# EAGLE board SignalMast-ColorLight-DualHead_array (EAGLE 7.7.0)
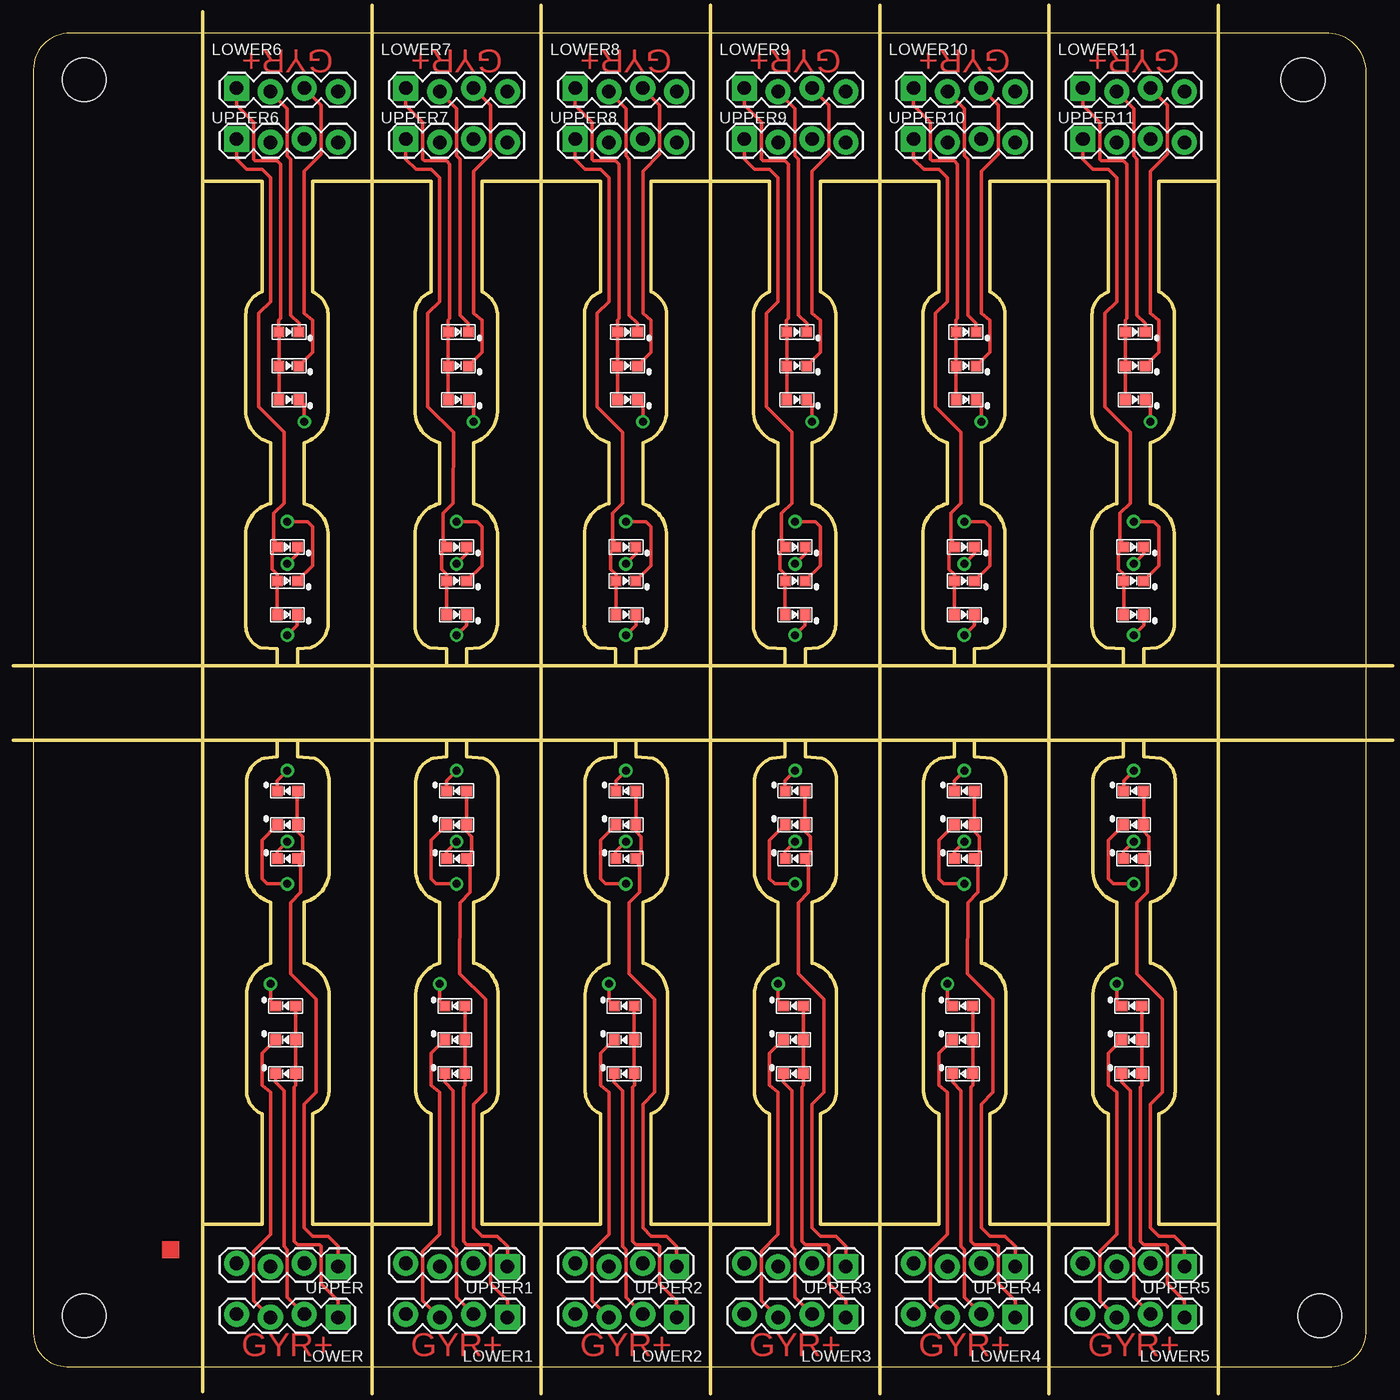
[diagram p0: board, top side]
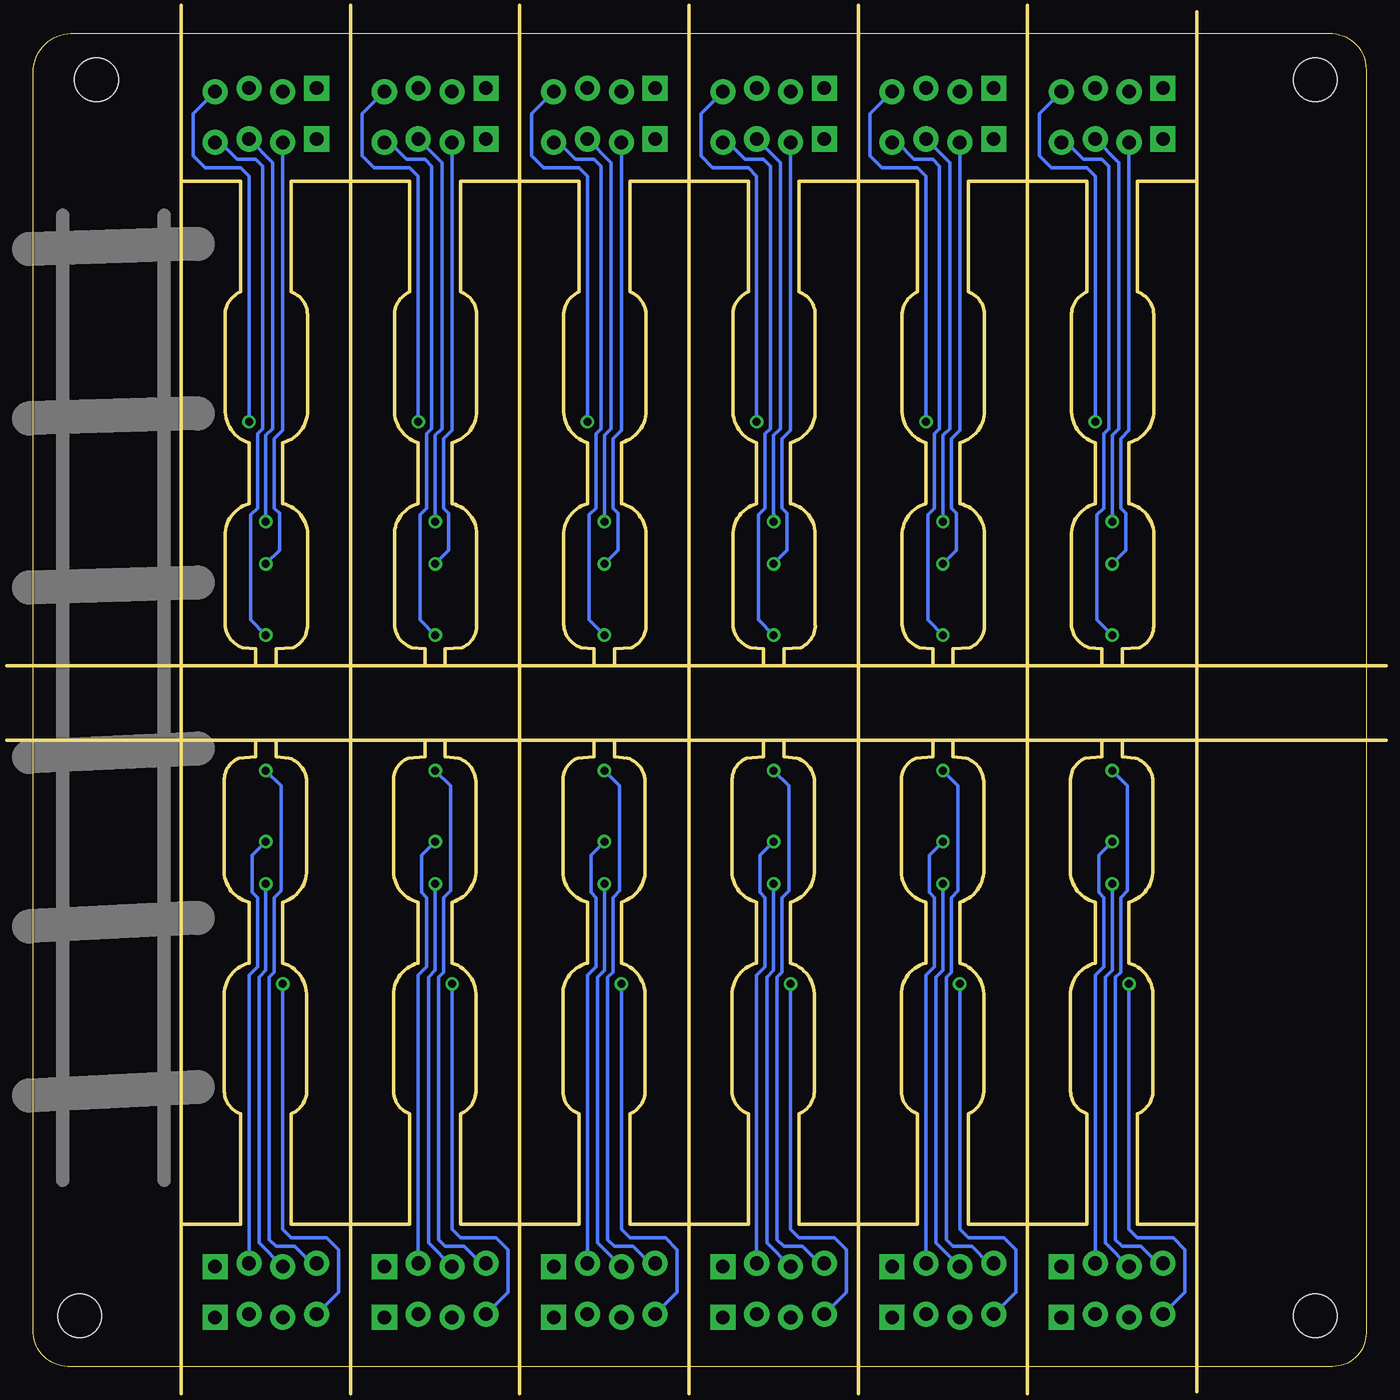
[diagram p1: board, bottom side, seen from below]

Size 100.01 x 100 mm. Coordinates in mm from the lower left corner, seen from the top.
Outline: 12.84,10.67 17.15,10.67 17.15,18.97 arc-70 16,20.78 16,27.97 arc-70 17.79,30.27 17.79,34.84 arc-70 16,37.04 16,43.89 arc-70 17.31,45.64 18.3,45.72 18.3,46.99 12.71,46.99
Outline: 25.41,10.67 20.96,10.67 20.96,18.97 arc70 22.18,20.65 22.18,28.1 arc70 20.33,30.27 20.33,34.84 arc70 22.18,36.91 22.18,43.89 arc70 21.09,45.64 19.82,45.72 19.82,46.99 31,46.99 31,45.72 30.01,45.64 arc70 28.7,43.89 28.7,37.04 arc70 30.49,34.84 30.49,30.27 arc70 28.7,27.97 28.7,20.78 arc70 29.85,18.97 29.85,10.67 25.54,10.67
Outline: 38.11,10.67 33.66,10.67 33.66,18.97 arc70 34.88,20.65 34.88,28.1 arc70 33.03,30.27 33.03,34.84 arc70 34.88,36.91 34.88,43.89 arc70 33.79,45.64 32.52,45.72 32.52,46.99 43.7,46.99 43.7,45.72 42.71,45.64 arc70 41.4,43.89 41.4,37.04 arc70 43.19,34.84 43.19,30.27 arc70 41.4,27.97 41.4,20.78 arc70 42.55,18.97 42.55,10.67 38.24,10.67
Outline: 50.81,10.67 46.36,10.67 46.36,18.97 arc70 47.58,20.65 47.58,28.1 arc70 45.73,30.27 45.73,34.84 arc70 47.58,36.91 47.58,43.89 arc70 46.49,45.64 45.22,45.72 45.22,46.99 56.4,46.99 56.4,45.72 55.41,45.64 arc70 54.1,43.89 54.1,37.04 arc70 55.89,34.84 55.89,30.27 arc70 54.1,27.97 54.1,20.78 arc70 55.25,18.97 55.25,10.67 50.94,10.67
Outline: 63.51,10.67 59.06,10.67 59.06,18.97 arc70 60.28,20.65 60.28,28.1 arc70 58.43,30.27 58.43,34.84 arc70 60.28,36.91 60.28,43.89 arc70 59.19,45.64 57.92,45.72 57.92,46.99 69.1,46.99 69.1,45.72 68.11,45.64 arc70 66.8,43.89 66.8,37.04 arc70 68.59,34.84 68.59,30.27 arc70 66.8,27.97 66.8,20.78 arc70 67.95,18.97 67.95,10.67 63.64,10.67
Outline: 76.21,10.67 71.76,10.67 71.76,18.97 arc70 72.98,20.65 72.98,28.1 arc70 71.13,30.27 71.13,34.84 arc70 72.98,36.91 72.98,43.89 arc70 71.89,45.64 70.62,45.72 70.62,46.99 81.8,46.99 81.8,45.72 80.81,45.64 arc70 79.5,43.89 79.5,37.04 arc70 81.29,34.84 81.29,30.27 arc70 79.5,27.97 79.5,20.78 arc70 80.65,18.97 80.65,10.67 76.34,10.67
Outline: 88.91,10.67 84.46,10.67 84.46,18.97 arc70 85.68,20.65 85.68,28.1 arc70 83.83,30.27 83.83,34.84 arc70 85.68,36.91 85.68,43.89 arc70 84.59,45.64 83.32,45.72 83.32,46.99 88.91,46.99
Outline: 25.28,88.9 20.96,88.9 20.96,80.61 arc-70 22.12,78.8 22.12,71.61 arc-70 20.33,69.3 20.33,64.73 arc-70 22.12,62.54 22.12,55.68 arc-70 20.81,53.94 19.82,53.85 19.82,52.58 31,52.58 31,53.85 29.73,53.94 arc-70 28.64,55.68 28.64,62.67 arc-70 30.49,64.73 30.49,69.3 arc-70 28.64,71.48 28.64,78.92 arc-70 29.85,80.61 29.85,88.9 25.41,88.9
Outline: 12.71,88.9 17.15,88.9 17.15,80.61 arc70 15.94,78.92 15.94,71.48 arc70 17.79,69.3 17.79,64.73 arc70 15.94,62.67 15.94,55.68 arc70 17.03,53.94 18.3,53.85 18.3,52.58 12.71,52.58
Outline: 37.98,88.9 33.66,88.9 33.66,80.61 arc-70 34.82,78.8 34.82,71.61 arc-70 33.03,69.3 33.03,64.73 arc-70 34.82,62.54 34.82,55.68 arc-70 33.51,53.94 32.52,53.85 32.52,52.58 43.7,52.58 43.7,53.85 42.43,53.94 arc-70 41.34,55.68 41.34,62.67 arc-70 43.19,64.73 43.19,69.3 arc-70 41.34,71.48 41.34,78.92 arc-70 42.55,80.61 42.55,88.9 38.11,88.9
Outline: 50.68,88.9 46.36,88.9 46.36,80.61 arc-70 47.52,78.8 47.52,71.61 arc-70 45.73,69.3 45.73,64.73 arc-70 47.52,62.54 47.52,55.68 arc-70 46.21,53.94 45.22,53.85 45.22,52.58 56.4,52.58 56.4,53.85 55.13,53.94 arc-70 54.04,55.68 54.04,62.67 arc-70 55.89,64.73 55.89,69.3 arc-70 54.04,71.48 54.04,78.92 arc-70 55.25,80.61 55.25,88.9 50.81,88.9
Outline: 63.38,88.9 59.06,88.9 59.06,80.61 arc-70 60.22,78.8 60.22,71.61 arc-70 58.43,69.3 58.43,64.73 arc-70 60.22,62.54 60.22,55.68 arc-70 58.91,53.94 57.92,53.85 57.92,52.58 69.1,52.58 69.1,53.85 67.83,53.94 arc-70 66.74,55.68 66.74,62.67 arc-70 68.59,64.73 68.59,69.3 arc-70 66.74,71.48 66.74,78.92 arc-70 67.95,80.61 67.95,88.9 63.51,88.9
Outline: 76.08,88.9 71.76,88.9 71.76,80.61 arc-70 72.92,78.8 72.92,71.61 arc-70 71.13,69.3 71.13,64.73 arc-70 72.92,62.54 72.92,55.68 arc-70 71.61,53.94 70.62,53.85 70.62,52.58 81.8,52.58 81.8,53.85 80.53,53.94 arc-70 79.44,55.68 79.44,62.67 arc-70 81.29,64.73 81.29,69.3 arc-70 79.44,71.48 79.44,78.92 arc-70 80.65,80.61 80.65,88.9 76.21,88.9
Outline: 88.78,88.9 84.46,88.9 84.46,80.61 arc-70 85.62,78.8 85.62,71.61 arc-70 83.83,69.3 83.83,64.73 arc-70 85.62,62.54 85.62,55.68 arc-70 84.31,53.94 83.32,53.85 83.32,52.58 88.91,52.58
Copper layers (1*16): Top 0.035mm / dielectric 1.5mm / Bottom 0.035mm
Design rules "default": minimum track width 10mil, minimum drill 24mil, track to track 8mil, track to pad 8mil, pad to pad 8mil, via to via 8mil, smd to smd 8mil, copper to edge 40mil, drill to drill 8mil, minimum pad ring 10mil, minimum via ring 8mil, stop-mask expansion 4mil, vias tented up to drill 0mil, thermal gap 10mil
Net classes: 0 default: width 0.203 mm
Holes 3.3 mm at 3.82,3.81 96.53,3.81 95.26,96.52 3.82,96.52
Milling: 11 lines

## Footprints (pad centres in the part's own frame; a part is rotated, then mirrored left to right if it is on the bottom)
0603-LED = smd 0.8 x 0.8: A 0.75,0; C -0.75,0
1X04_LOCK = drill 1.016 pad 1.88 square: 1 0,0.127 | drill 1.016 pad 1.88: 2 2.54,-0.127; 3 5.08,0.127; 4 7.62,-0.127

## Placement (x,y rotation side)
BOARD1  BOARD  [BOARD-SEEED10X10-NOHOLES]  0.01,0 0 top
LED1  R  [0603-LED]  19.06,38.1 0 top
LED2  Y  [0603-LED]  19.06,40.64 0 top
LED3  G  [0603-LED]  19.06,43.18 0 top
LED4  R  [0603-LED]  18.93,21.97 0 top
LED5  Y  [0603-LED]  18.93,24.51 0 top
LED6  G  [0603-LED]  18.93,27.05 0 top
LED7  R  [0603-LED]  31.76,38.1 0 top
LED8  Y  [0603-LED]  31.76,40.64 0 top
LED9  G  [0603-LED]  31.76,43.18 0 top
LED10  R  [0603-LED]  31.63,21.97 0 top
LED11  Y  [0603-LED]  31.63,24.51 0 top
LED12  G  [0603-LED]  31.63,27.05 0 top
LED13  R  [0603-LED]  44.46,38.1 0 top
LED14  Y  [0603-LED]  44.46,40.64 0 top
LED15  G  [0603-LED]  44.46,43.18 0 top
LED16  R  [0603-LED]  44.33,21.97 0 top
LED17  Y  [0603-LED]  44.33,24.51 0 top
LED18  G  [0603-LED]  44.33,27.05 0 top
LED19  R  [0603-LED]  57.16,38.1 0 top
LED20  Y  [0603-LED]  57.16,40.64 0 top
LED21  G  [0603-LED]  57.16,43.18 0 top
LED22  R  [0603-LED]  57.03,21.97 0 top
LED23  Y  [0603-LED]  57.03,24.51 0 top
LED24  G  [0603-LED]  57.03,27.05 0 top
LED25  R  [0603-LED]  69.86,38.1 0 top
LED26  Y  [0603-LED]  69.86,40.64 0 top
LED27  G  [0603-LED]  69.86,43.18 0 top
LED28  R  [0603-LED]  69.73,21.97 0 top
LED29  Y  [0603-LED]  69.73,24.51 0 top
LED30  G  [0603-LED]  69.73,27.05 0 top
LED31  R  [0603-LED]  82.56,38.1 0 top
LED32  Y  [0603-LED]  82.56,40.64 0 top
LED33  G  [0603-LED]  82.56,43.18 0 top
LED34  R  [0603-LED]  82.43,21.97 0 top
LED35  Y  [0603-LED]  82.43,24.51 0 top
LED36  G  [0603-LED]  82.43,27.05 0 top
LED37  R  [0603-LED]  19.06,61.47 180 top
LED38  Y  [0603-LED]  19.06,58.93 180 top
LED39  G  [0603-LED]  19.06,56.39 180 top
LED40  R  [0603-LED]  19.19,77.6 180 top
LED41  Y  [0603-LED]  19.19,75.06 180 top
LED42  G  [0603-LED]  19.19,72.52 180 top
LED43  R  [0603-LED]  31.76,61.47 180 top
LED44  Y  [0603-LED]  31.76,58.93 180 top
LED45  G  [0603-LED]  31.76,56.39 180 top
LED46  R  [0603-LED]  31.89,77.6 180 top
LED47  Y  [0603-LED]  31.89,75.06 180 top
LED48  G  [0603-LED]  31.89,72.52 180 top
LED49  R  [0603-LED]  44.46,61.47 180 top
LED50  Y  [0603-LED]  44.46,58.93 180 top
LED51  G  [0603-LED]  44.46,56.39 180 top
LED52  R  [0603-LED]  44.59,77.6 180 top
LED53  Y  [0603-LED]  44.59,75.06 180 top
LED54  G  [0603-LED]  44.59,72.52 180 top
LED55  R  [0603-LED]  57.16,61.47 180 top
LED56  Y  [0603-LED]  57.16,58.93 180 top
LED57  G  [0603-LED]  57.16,56.39 180 top
LED58  R  [0603-LED]  57.29,77.6 180 top
LED59  Y  [0603-LED]  57.29,75.06 180 top
LED60  G  [0603-LED]  57.29,72.52 180 top
LED61  R  [0603-LED]  69.86,61.47 180 top
LED62  Y  [0603-LED]  69.86,58.93 180 top
LED63  G  [0603-LED]  69.86,56.39 180 top
LED64  R  [0603-LED]  69.99,77.6 180 top
LED65  Y  [0603-LED]  69.99,75.06 180 top
LED66  G  [0603-LED]  69.99,72.52 180 top
LED67  R  [0603-LED]  82.56,61.47 180 top
LED68  Y  [0603-LED]  82.56,58.93 180 top
LED69  G  [0603-LED]  82.56,56.39 180 top
LED70  R  [0603-LED]  82.69,77.6 180 top
LED71  Y  [0603-LED]  82.69,75.06 180 top
LED72  G  [0603-LED]  82.69,72.52 180 top
LOWER  0.100  [1X04_LOCK]  22.87,3.81 180 top
LOWER1  0.100  [1X04_LOCK]  35.57,3.81 180 top
LOWER2  0.100  [1X04_LOCK]  48.27,3.81 180 top
LOWER3  0.100  [1X04_LOCK]  60.97,3.81 180 top
LOWER4  0.100  [1X04_LOCK]  73.67,3.81 180 top
LOWER5  0.100  [1X04_LOCK]  86.37,3.81 180 top
LOWER6  0.100  [1X04_LOCK]  15.25,95.76 0 top
LOWER7  0.100  [1X04_LOCK]  27.95,95.76 0 top
LOWER8  0.100  [1X04_LOCK]  40.65,95.76 0 top
LOWER9  0.100  [1X04_LOCK]  53.35,95.76 0 top
LOWER10  0.100  [1X04_LOCK]  66.05,95.76 0 top
LOWER11  0.100  [1X04_LOCK]  78.75,95.76 0 top
UPPER  0.100  [1X04_LOCK]  22.87,7.62 180 top
UPPER1  0.100  [1X04_LOCK]  35.57,7.62 180 top
UPPER2  0.100  [1X04_LOCK]  48.27,7.62 180 top
UPPER3  0.100  [1X04_LOCK]  60.97,7.62 180 top
UPPER4  0.100  [1X04_LOCK]  73.67,7.62 180 top
UPPER5  0.100  [1X04_LOCK]  86.37,7.62 180 top
UPPER6  0.100  [1X04_LOCK]  15.25,91.95 0 top
UPPER7  0.100  [1X04_LOCK]  27.95,91.95 0 top
UPPER8  0.100  [1X04_LOCK]  40.65,91.95 0 top
UPPER9  0.100  [1X04_LOCK]  53.35,91.95 0 top
UPPER10  0.100  [1X04_LOCK]  66.05,91.95 0 top
UPPER11  0.100  [1X04_LOCK]  78.75,91.95 0 top

## Library data of the parts
BOARD1 LOWER LOWER1-LOWER11 UPPER UPPER1-UPPER11 = SPCoast
LED1 LED4 LED7 LED10 LED13 LED16 LED19 LED22 LED25 LED28 LED31 LED34 LED37 LED40 LED43 LED46 LED49 LED52 LED55 LED58 LED61 LED64 LED67 LED70 = SPCoast; OPL: 19-217-R6C-AL1M2VY-3T
LED2 LED5 LED8 LED11 LED14 LED17 LED20 LED23 LED26 LED29 LED32 LED35 LED38 LED41 LED44 LED47 LED50 LED53 LED56 LED59 LED62 LED65 LED68 LED71 = SPCoast; OPL: 19-217-Y5C-AM1N1VY-3T
LED3 LED6 LED9 LED12 LED15 LED18 LED21 LED24 LED27 LED30 LED33 LED36 LED39 LED42 LED45 LED48 LED51 LED54 LED57 LED60 LED63 LED66 LED69 LED72 = SPCoast; OPL: 19-217-G7C-AN1P2-3T

## Nets
AG: LED6.C LOWER.4
AG1: LED12.C LOWER1.4
AG2: LED18.C LOWER2.4
AG3: LED24.C LOWER3.4
AG4: LED30.C LOWER4.4
AG5: LED36.C LOWER5.4
AG6: LED42.C LOWER6.4
AG7: LED48.C LOWER7.4
AG8: LED54.C LOWER8.4
AG9: LED60.C LOWER9.4
AG10: LED66.C LOWER10.4
AG11: LED72.C LOWER11.4
AR: LED4.C LOWER.2
AR1: LED10.C LOWER1.2
AR2: LED16.C LOWER2.2
AR3: LED22.C LOWER3.2
AR4: LED28.C LOWER4.2
AR5: LED34.C LOWER5.2
AR6: LED40.C LOWER6.2
AR7: LED46.C LOWER7.2
AR8: LED52.C LOWER8.2
AR9: LED58.C LOWER9.2
AR10: LED64.C LOWER10.2
AR11: LED70.C LOWER11.2
AV+: LED4.A LED5.A LED6.A LOWER.1
AV+1: LED10.A LED11.A LED12.A LOWER1.1
AV+2: LED16.A LED17.A LED18.A LOWER2.1
AV+3: LED22.A LED23.A LED24.A LOWER3.1
AV+4: LED28.A LED29.A LED30.A LOWER4.1
AV+5: LED34.A LED35.A LED36.A LOWER5.1
AV+6: LED40.A LED41.A LED42.A LOWER6.1
AV+7: LED46.A LED47.A LED48.A LOWER7.1
AV+8: LED52.A LED53.A LED54.A LOWER8.1
AV+9: LED58.A LED59.A LED60.A LOWER9.1
AV+10: LED64.A LED65.A LED66.A LOWER10.1
AV+11: LED70.A LED71.A LED72.A LOWER11.1
AY: LED5.C LOWER.3
AY1: LED11.C LOWER1.3
AY2: LED17.C LOWER2.3
AY3: LED23.C LOWER3.3
AY4: LED29.C LOWER4.3
AY5: LED35.C LOWER5.3
AY6: LED41.C LOWER6.3
AY7: LED47.C LOWER7.3
AY8: LED53.C LOWER8.3
AY9: LED59.C LOWER9.3
AY10: LED65.C LOWER10.3
AY11: LED71.C LOWER11.3
BG: LED3.C UPPER.4
BG1: LED9.C UPPER1.4
BG2: LED15.C UPPER2.4
BG3: LED21.C UPPER3.4
BG4: LED27.C UPPER4.4
BG5: LED33.C UPPER5.4
BG6: LED39.C UPPER6.4
BG7: LED45.C UPPER7.4
BG8: LED51.C UPPER8.4
BG9: LED57.C UPPER9.4
BG10: LED63.C UPPER10.4
BG11: LED69.C UPPER11.4
BR: LED1.C UPPER.2
BR1: LED7.C UPPER1.2
BR2: LED13.C UPPER2.2
BR3: LED19.C UPPER3.2
BR4: LED25.C UPPER4.2
BR5: LED31.C UPPER5.2
BR6: LED37.C UPPER6.2
BR7: LED43.C UPPER7.2
BR8: LED49.C UPPER8.2
BR9: LED55.C UPPER9.2
BR10: LED61.C UPPER10.2
BR11: LED67.C UPPER11.2
BV+: LED1.A LED2.A LED3.A UPPER.1
BV+1: LED7.A LED8.A LED9.A UPPER1.1
BV+2: LED13.A LED14.A LED15.A UPPER2.1
BV+3: LED19.A LED20.A LED21.A UPPER3.1
BV+4: LED25.A LED26.A LED27.A UPPER4.1
BV+5: LED31.A LED32.A LED33.A UPPER5.1
BV+6: LED37.A LED38.A LED39.A UPPER6.1
BV+7: LED43.A LED44.A LED45.A UPPER7.1
BV+8: LED49.A LED50.A LED51.A UPPER8.1
BV+9: LED55.A LED56.A LED57.A UPPER9.1
BV+10: LED61.A LED62.A LED63.A UPPER10.1
BV+11: LED67.A LED68.A LED69.A UPPER11.1
BY: LED2.C UPPER.3
BY1: LED8.C UPPER1.3
BY2: LED14.C UPPER2.3
BY3: LED20.C UPPER3.3
BY4: LED26.C UPPER4.3
BY5: LED32.C UPPER5.3
BY6: LED38.C UPPER6.3
BY7: LED44.C UPPER7.3
BY8: LED50.C UPPER8.3
BY9: LED56.C UPPER9.3
BY10: LED62.C UPPER10.3
BY11: LED68.C UPPER11.3

## Tracks (layer width: path | path; a pad name or v marks a point on that pad's centre or on a via)
AG  (via drill 0.6)
  Top 0.254: LED6.C 17.79,27.45 v17.79,28.71
  Bottom 0.254: v17.79,28.71 17.79,10.29 17.15,9.66 14.49,9.66 13.6,8.77 13.6,5.59 LOWER.4
AG1  (via drill 0.6)
  Top 0.254: LED12.C 30.49,27.45 v30.49,28.71
  Bottom 0.254: v30.49,28.71 30.49,10.29 29.85,9.66 27.19,9.66 26.3,8.77 26.3,5.59 LOWER1.4
AG2  (via drill 0.6)
  Top 0.254: LED18.C 43.19,27.45 v43.19,28.71
  Bottom 0.254: v43.19,28.71 43.19,10.29 42.55,9.66 39.89,9.66 39,8.77 39,5.59 LOWER2.4
AG3  (via drill 0.6)
  Top 0.254: LED24.C 55.89,27.45 v55.89,28.71
  Bottom 0.254: v55.89,28.71 55.89,10.29 55.25,9.66 52.59,9.66 51.7,8.77 51.7,5.59 LOWER3.4
AG4  (via drill 0.6)
  Top 0.254: LED30.C 68.59,27.45 v68.59,28.71
  Bottom 0.254: v68.59,28.71 68.59,10.29 67.95,9.66 65.29,9.66 64.4,8.77 64.4,5.59 LOWER4.4
AG5  (via drill 0.6)
  Top 0.254: LED36.C 81.29,27.45 v81.29,28.71
  Bottom 0.254: v81.29,28.71 81.29,10.29 80.65,9.66 77.99,9.66 77.1,8.77 77.1,5.59 LOWER5.4
AG6  (via drill 0.6)
  Top 0.254: LED42.C 20.33,72.13 v20.33,70.87
  Bottom 0.254: v20.33,70.87 20.33,89.28 20.96,89.92 23.63,89.92 24.52,90.81 24.52,93.98 LOWER6.4
AG7  (via drill 0.6)
  Top 0.254: LED48.C 33.03,72.13 v33.03,70.87
  Bottom 0.254: v33.03,70.87 33.03,89.28 33.66,89.92 36.33,89.92 37.22,90.81 37.22,93.98 LOWER7.4
AG8  (via drill 0.6)
  Top 0.254: LED54.C 45.73,72.13 v45.73,70.87
  Bottom 0.254: v45.73,70.87 45.73,89.28 46.36,89.92 49.03,89.92 49.92,90.81 49.92,93.98 LOWER8.4
AG9  (via drill 0.6)
  Top 0.254: LED60.C 58.43,72.13 v58.43,70.87
  Bottom 0.254: v58.43,70.87 58.43,89.28 59.06,89.92 61.73,89.92 62.62,90.81 62.62,93.98 LOWER9.4
AG10  (via drill 0.6)
  Top 0.254: LED66.C 71.13,72.13 v71.13,70.87
  Bottom 0.254: v71.13,70.87 71.13,89.28 71.76,89.92 74.43,89.92 75.32,90.81 75.32,93.98 LOWER10.4
AG11  (via drill 0.6)
  Top 0.254: LED72.C 83.83,72.13 v83.83,70.87
  Bottom 0.254: v83.83,70.87 83.83,89.28 84.46,89.92 87.13,89.92 88.02,90.81 88.02,93.98 LOWER11.4
AR
  Top 0.254: LOWER.2 19.06,5.21 19.06,8.77 18.81,9.02 18.81,20.7 18.18,21.33 LED4.C
AR1
  Top 0.254: LOWER1.2 31.76,5.21 31.76,8.77 31.51,9.02 31.51,20.7 30.88,21.33 LED10.C
AR2
  Top 0.254: LOWER2.2 44.46,5.21 44.46,8.77 44.21,9.02 44.21,20.7 43.58,21.33 LED16.C
AR3
  Top 0.254: LOWER3.2 57.16,5.21 57.16,8.77 56.91,9.02 56.91,20.7 56.28,21.33 LED22.C
AR4
  Top 0.254: LOWER4.2 69.86,5.21 69.86,8.77 69.61,9.02 69.61,20.7 68.98,21.33 LED28.C
AR5
  Top 0.254: LOWER5.2 82.56,5.21 82.56,8.77 82.31,9.02 82.31,20.7 81.68,21.33 LED34.C
AR6
  Top 0.254: LOWER6.2 19.06,94.36 19.06,90.81 19.31,90.55 19.31,78.87 19.94,78.25 LED40.C
AR7
  Top 0.254: LOWER7.2 31.76,94.36 31.76,90.81 32.01,90.55 32.01,78.87 32.64,78.25 LED46.C
AR8
  Top 0.254: LOWER8.2 44.46,94.36 44.46,90.81 44.71,90.55 44.71,78.87 45.34,78.25 LED52.C
AR9
  Top 0.254: LOWER9.2 57.16,94.36 57.16,90.81 57.41,90.55 57.41,78.87 58.04,78.25 LED58.C
AR10
  Top 0.254: LOWER10.2 69.86,94.36 69.86,90.81 70.11,90.55 70.11,78.87 70.74,78.25 LED64.C
AR11
  Top 0.254: LOWER11.2 82.56,94.36 82.56,90.81 82.81,90.55 82.81,78.87 83.44,78.25 LED70.C
AV+
  Top 0.254: LED6.A LED5.A LED4.A 19.69,21.96 19.69,21.09 19.57,20.96 19.57,9.4 19.82,9.15 21.47,9.15 21.6,9.02 21.6,6.23 22.87,4.96 LOWER.1
AV+1
  Top 0.254: LED12.A LED11.A LED10.A 32.39,21.96 32.39,21.09 32.27,20.96 32.27,9.4 32.52,9.15 34.17,9.15 34.3,9.02 34.3,6.23 35.57,4.96 LOWER1.1
AV+2
  Top 0.254: LED18.A LED17.A LED16.A 45.09,21.96 45.09,21.09 44.97,20.96 44.97,9.4 45.22,9.15 46.87,9.15 47,9.02 47,6.23 48.27,4.96 LOWER2.1
AV+3
  Top 0.254: LED24.A LED23.A LED22.A 57.79,21.96 57.79,21.09 57.67,20.96 57.67,9.4 57.92,9.15 59.57,9.15 59.7,9.02 59.7,6.23 60.97,4.96 LOWER3.1
AV+4
  Top 0.254: LED30.A LED29.A LED28.A 70.49,21.96 70.49,21.09 70.37,20.96 70.37,9.4 70.62,9.15 72.27,9.15 72.4,9.02 72.4,6.23 73.67,4.96 LOWER4.1
AV+5
  Top 0.254: LED36.A LED35.A LED34.A 83.19,21.96 83.19,21.09 83.07,20.96 83.07,9.4 83.32,9.15 84.97,9.15 85.1,9.02 85.1,6.23 86.37,4.96 LOWER5.1
AV+6
  Top 0.254: LED42.A LED41.A LED40.A 18.42,77.61 18.42,78.49 18.55,78.62 18.55,90.17 18.3,90.43 16.65,90.43 16.52,90.55 16.52,93.35 15.25,94.62 LOWER6.1
AV+7
  Top 0.254: LED48.A LED47.A LED46.A 31.12,77.61 31.12,78.49 31.25,78.62 31.25,90.17 31,90.43 29.35,90.43 29.22,90.55 29.22,93.35 27.95,94.62 LOWER7.1
AV+8
  Top 0.254: LED54.A LED53.A LED52.A 43.82,77.61 43.82,78.49 43.95,78.62 43.95,90.17 43.7,90.43 42.05,90.43 41.92,90.55 41.92,93.35 40.65,94.62 LOWER8.1
AV+9
  Top 0.254: LED60.A LED59.A LED58.A 56.52,77.61 56.52,78.49 56.65,78.62 56.65,90.17 56.4,90.43 54.75,90.43 54.62,90.55 54.62,93.35 53.35,94.62 LOWER9.1
AV+10
  Top 0.254: LED66.A LED65.A LED64.A 69.22,77.61 69.22,78.49 69.35,78.62 69.35,90.17 69.1,90.43 67.45,90.43 67.32,90.55 67.32,93.35 66.05,94.62 LOWER10.1
AV+11
  Top 0.254: LED72.A LED71.A LED70.A 81.92,77.61 81.92,78.49 82.05,78.62 82.05,90.17 81.8,90.43 80.15,90.43 80.02,90.55 80.02,93.35 78.75,94.62 LOWER11.1
AY
  Top 0.254: LOWER.3 16.52,4.96 16.52,8.64 17.79,9.91 17.79,20.58 17.15,21.09 17.15,23.5 LED5.C
AY1
  Top 0.254: LOWER1.3 29.22,4.96 29.22,8.64 30.49,9.91 30.49,20.58 29.85,21.09 29.85,23.5 LED11.C
AY2
  Top 0.254: LOWER2.3 41.92,4.96 41.92,8.64 43.19,9.91 43.19,20.58 42.55,21.09 42.55,23.5 LED17.C
AY3
  Top 0.254: LOWER3.3 54.62,4.96 54.62,8.64 55.89,9.91 55.89,20.58 55.25,21.09 55.25,23.5 LED23.C
AY4
  Top 0.254: LOWER4.3 67.32,4.96 67.32,8.64 68.59,9.91 68.59,20.58 67.95,21.09 67.95,23.5 LED29.C
AY5
  Top 0.254: LOWER5.3 80.02,4.96 80.02,8.64 81.29,9.91 81.29,20.58 80.65,21.09 80.65,23.5 LED35.C
AY6
  Top 0.254: LOWER6.3 21.6,94.62 21.6,90.94 20.33,89.67 20.33,79 20.96,78.49 20.96,76.08 LED41.C
AY7
  Top 0.254: LOWER7.3 34.3,94.62 34.3,90.94 33.03,89.67 33.03,79 33.66,78.49 33.66,76.08 LED47.C
AY8
  Top 0.254: LOWER8.3 47,94.62 47,90.94 45.73,89.67 45.73,79 46.36,78.49 46.36,76.08 LED53.C
AY9
  Top 0.254: LOWER9.3 59.7,94.62 59.7,90.94 58.43,89.67 58.43,79 59.06,78.49 59.06,76.08 LED59.C
AY10
  Top 0.254: LOWER10.3 72.4,94.62 72.4,90.94 71.13,89.67 71.13,79 71.76,78.49 71.76,76.08 LED65.C
AY11
  Top 0.254: LOWER11.3 85.1,94.62 85.1,90.94 83.83,89.67 83.83,79 84.46,78.49 84.46,76.08 LED71.C
BG  (via drill 0.6)
  Top 0.254: LED3.C 18.31,43.96 v19.06,44.71
  Bottom 0.254: v19.06,44.71 17.92,43.56 17.92,35.69 18.42,35.18 18.42,29.59 18.81,29.21 18.81,9.53 18.3,9.02 16.9,9.02 15.63,7.75 UPPER.4
BG1  (via drill 0.6)
  Top 0.254: LED9.C 31.01,43.96 v31.76,44.71
  Bottom 0.254: v31.76,44.71 30.62,43.56 30.62,35.69 31.12,35.18 31.12,29.59 31.51,29.21 31.51,9.53 31,9.02 29.6,9.02 28.33,7.75 UPPER1.4
BG2  (via drill 0.6)
  Top 0.254: LED15.C 43.71,43.96 v44.46,44.71
  Bottom 0.254: v44.46,44.71 43.32,43.56 43.32,35.69 43.82,35.18 43.82,29.59 44.21,29.21 44.21,9.53 43.7,9.02 42.3,9.02 41.03,7.75 UPPER2.4
BG3  (via drill 0.6)
  Top 0.254: LED21.C 56.41,43.96 v57.16,44.71
  Bottom 0.254: v57.16,44.71 56.02,43.56 56.02,35.69 56.52,35.18 56.52,29.59 56.91,29.21 56.91,9.53 56.4,9.02 55,9.02 53.73,7.75 UPPER3.4
BG4  (via drill 0.6)
  Top 0.254: LED27.C 69.11,43.96 v69.86,44.71
  Bottom 0.254: v69.86,44.71 68.72,43.56 68.72,35.69 69.22,35.18 69.22,29.59 69.61,29.21 69.61,9.53 69.1,9.02 67.7,9.02 66.43,7.75 UPPER4.4
BG5  (via drill 0.6)
  Top 0.254: LED33.C 81.81,43.96 v82.56,44.71
  Bottom 0.254: v82.56,44.71 81.42,43.56 81.42,35.69 81.92,35.18 81.92,29.59 82.31,29.21 82.31,9.53 81.8,9.02 80.4,9.02 79.13,7.75 UPPER5.4
BG6  (via drill 0.6)
  Top 0.254: LED39.C 19.81,55.62 v19.06,54.87
  Bottom 0.254: v19.06,54.87 20.2,56.01 20.2,63.88 19.69,64.39 19.69,69.98 19.31,70.36 19.31,90.05 19.82,90.55 21.22,90.55 22.49,91.82 UPPER6.4
BG7  (via drill 0.6)
  Top 0.254: LED45.C 32.51,55.62 v31.76,54.87
  Bottom 0.254: v31.76,54.87 32.9,56.01 32.9,63.88 32.39,64.39 32.39,69.98 32.01,70.36 32.01,90.05 32.52,90.55 33.92,90.55 35.19,91.82 UPPER7.4
BG8  (via drill 0.6)
  Top 0.254: LED51.C 45.21,55.62 v44.46,54.87
  Bottom 0.254: v44.46,54.87 45.6,56.01 45.6,63.88 45.09,64.39 45.09,69.98 44.71,70.36 44.71,90.05 45.22,90.55 46.62,90.55 47.89,91.82 UPPER8.4
BG9  (via drill 0.6)
  Top 0.254: LED57.C 57.91,55.62 v57.16,54.87
  Bottom 0.254: v57.16,54.87 58.3,56.01 58.3,63.88 57.79,64.39 57.79,69.98 57.41,70.36 57.41,90.05 57.92,90.55 59.32,90.55 60.59,91.82 UPPER9.4
BG10  (via drill 0.6)
  Top 0.254: LED63.C 70.61,55.62 v69.86,54.87
  Bottom 0.254: v69.86,54.87 71,56.01 71,63.88 70.49,64.39 70.49,69.98 70.11,70.36 70.11,90.05 70.62,90.55 72.02,90.55 73.29,91.82 UPPER10.4
BG11  (via drill 0.6)
  Top 0.254: LED69.C 83.31,55.62 v82.56,54.87
  Bottom 0.254: v82.56,54.87 83.7,56.01 83.7,63.88 83.19,64.39 83.19,69.98 82.81,70.36 82.81,90.05 83.32,90.55 84.72,90.55 85.99,91.82 UPPER11.4
BR  (via drill 0.6)
  Top 0.254: LED1.C 18.3,38.62 v19.06,39.37
  Bottom 0.254: v19.06,39.37 20.08,38.36 20.08,35.56 19.69,35.18 19.69,29.98 20.33,29.34 UPPER.2
BR1  (via drill 0.6)
  Top 0.254: LED7.C 31,38.62 v31.76,39.37
  Bottom 0.254: v31.76,39.37 32.78,38.36 32.78,35.56 32.39,35.18 32.39,29.98 33.03,29.34 UPPER1.2
BR2  (via drill 0.6)
  Top 0.254: LED13.C 43.7,38.62 v44.46,39.37
  Bottom 0.254: v44.46,39.37 45.48,38.36 45.48,35.56 45.09,35.18 45.09,29.98 45.73,29.34 UPPER2.2
BR3  (via drill 0.6)
  Top 0.254: LED19.C 56.4,38.62 v57.16,39.37
  Bottom 0.254: v57.16,39.37 58.18,38.36 58.18,35.56 57.79,35.18 57.79,29.98 58.43,29.34 UPPER3.2
BR4  (via drill 0.6)
  Top 0.254: LED25.C 69.1,38.62 v69.86,39.37
  Bottom 0.254: v69.86,39.37 70.88,38.36 70.88,35.56 70.49,35.18 70.49,29.98 71.13,29.34 UPPER4.2
BR5  (via drill 0.6)
  Top 0.254: LED31.C 81.8,38.62 v82.56,39.37
  Bottom 0.254: v82.56,39.37 83.58,38.36 83.58,35.56 83.19,35.18 83.19,29.98 83.83,29.34 UPPER5.2
BR6  (via drill 0.6)
  Top 0.254: LED37.C 19.82,60.95 v19.06,60.2
  Bottom 0.254: v19.06,60.2 18.04,61.22 18.04,64.01 18.42,64.39 18.42,69.6 17.79,70.23 UPPER6.2
BR7  (via drill 0.6)
  Top 0.254: LED43.C 32.52,60.95 v31.76,60.2
  Bottom 0.254: v31.76,60.2 30.74,61.22 30.74,64.01 31.12,64.39 31.12,69.6 30.49,70.23 UPPER7.2
BR8  (via drill 0.6)
  Top 0.254: LED49.C 45.22,60.95 v44.46,60.2
  Bottom 0.254: v44.46,60.2 43.44,61.22 43.44,64.01 43.82,64.39 43.82,69.6 43.19,70.23 UPPER8.2
BR9  (via drill 0.6)
  Top 0.254: LED55.C 57.92,60.95 v57.16,60.2
  Bottom 0.254: v57.16,60.2 56.14,61.22 56.14,64.01 56.52,64.39 56.52,69.6 55.89,70.23 UPPER9.2
BR10  (via drill 0.6)
  Top 0.254: LED61.C 70.62,60.95 v69.86,60.2
  Bottom 0.254: v69.86,60.2 68.84,61.22 68.84,64.01 69.22,64.39 69.22,69.6 68.59,70.23 UPPER10.2
BR11  (via drill 0.6)
  Top 0.254: LED67.C 83.32,60.95 v82.56,60.2
  Bottom 0.254: v82.56,60.2 81.54,61.22 81.54,64.01 81.92,64.39 81.92,69.6 81.29,70.23 UPPER11.2
BV+
  Top 0.254: UPPER.1 22.87,9.02 22.11,9.78 20.96,9.78 20.33,10.42 20.33,19.69 21.22,20.58 21.22,27.56 19.3,29.48 19.31,34.8 20.08,35.56 20.08,37.6 19.81,37.86 LED1.A 20.2,38.5 20.2,39.75 19.81,40.15 LED2.A LED3.A
BV+1
  Top 0.254: UPPER1.1 35.57,9.02 34.81,9.78 33.66,9.78 33.03,10.42 33.03,19.69 33.92,20.58 33.92,27.56 32,29.48 32.01,34.8 32.78,35.56 32.78,37.6 32.51,37.86 LED7.A 32.9,38.5 32.9,39.75 32.51,40.15 LED8.A LED9.A
BV+2
  Top 0.254: UPPER2.1 48.27,9.02 47.51,9.78 46.36,9.78 45.73,10.42 45.73,19.69 46.62,20.58 46.62,27.56 44.7,29.48 44.71,34.8 45.48,35.56 45.48,37.6 45.21,37.86 LED13.A 45.6,38.5 45.6,39.75 45.21,40.15 LED14.A LED15.A
BV+3
  Top 0.254: UPPER3.1 60.97,9.02 60.21,9.78 59.06,9.78 58.43,10.42 58.43,19.69 59.32,20.58 59.32,27.56 57.4,29.48 57.41,34.8 58.18,35.56 58.18,37.6 57.91,37.86 LED19.A 58.3,38.5 58.3,39.75 57.91,40.15 LED20.A LED21.A
BV+4
  Top 0.254: UPPER4.1 73.67,9.02 72.91,9.78 71.76,9.78 71.13,10.42 71.13,19.69 72.02,20.58 72.02,27.56 70.1,29.48 70.11,34.8 70.88,35.56 70.88,37.6 70.61,37.86 LED25.A 71,38.5 71,39.75 70.61,40.15 LED26.A LED27.A
BV+5
  Top 0.254: UPPER5.1 86.37,9.02 85.61,9.78 84.46,9.78 83.83,10.42 83.83,19.69 84.72,20.58 84.72,27.56 82.8,29.48 82.81,34.8 83.58,35.56 83.58,37.6 83.31,37.86 LED31.A 83.7,38.5 83.7,39.75 83.31,40.15 LED32.A LED33.A
BV+6
  Top 0.254: UPPER6.1 15.25,90.55 16.01,89.79 17.15,89.79 17.79,89.16 17.79,79.89 16.9,79 16.9,72.01 18.82,70.1 18.81,64.77 18.04,64.01 18.04,61.98 18.31,61.71 LED37.A 17.92,61.08 17.92,59.82 18.31,59.43 LED38.A LED39.A
BV+7
  Top 0.254: UPPER7.1 27.95,90.55 28.71,89.79 29.85,89.79 30.49,89.16 30.49,79.89 29.6,79 29.6,72.01 31.52,70.1 31.51,64.77 30.74,64.01 30.74,61.98 31.01,61.71 LED43.A 30.62,61.08 30.62,59.82 31.01,59.43 LED44.A LED45.A
BV+8
  Top 0.254: UPPER8.1 40.65,90.55 41.41,89.79 42.55,89.79 43.19,89.16 43.19,79.89 42.3,79 42.3,72.01 44.22,70.1 44.21,64.77 43.44,64.01 43.44,61.98 43.71,61.71 LED49.A 43.32,61.08 43.32,59.82 43.71,59.43 LED50.A LED51.A
BV+9
  Top 0.254: UPPER9.1 53.35,90.55 54.11,89.79 55.25,89.79 55.89,89.16 55.89,79.89 55,79 55,72.01 56.92,70.1 56.91,64.77 56.14,64.01 56.14,61.98 56.41,61.71 LED55.A 56.02,61.08 56.02,59.82 56.41,59.43 LED56.A LED57.A
BV+10
  Top 0.254: UPPER10.1 66.05,90.55 66.81,89.79 67.95,89.79 68.59,89.16 68.59,79.89 67.7,79 67.7,72.01 69.62,70.1 69.61,64.77 68.84,64.01 68.84,61.98 69.11,61.71 LED61.A 68.72,61.08 68.72,59.82 69.11,59.43 LED62.A LED63.A
BV+11
  Top 0.254: UPPER11.1 78.75,90.55 79.51,89.79 80.65,89.79 81.29,89.16 81.29,79.89 80.4,79 80.4,72.01 82.32,70.1 82.31,64.77 81.54,64.01 81.54,61.98 81.81,61.71 LED67.A 81.42,61.08 81.42,59.82 81.81,59.43 LED68.A LED69.A
BY  (via drill 0.6)
  Top 0.254: LED2.C 17.15,39.49 17.15,36.58 17.54,36.2 v19.06,36.2
  Bottom 0.254: v19.06,36.2 19.06,29.72 19.57,29.21 19.57,9.27 UPPER.3
BY1  (via drill 0.6)
  Top 0.254: LED8.C 29.85,39.49 29.85,36.58 30.24,36.2 v31.76,36.2
  Bottom 0.254: v31.76,36.2 31.76,29.72 32.27,29.21 32.27,9.27 UPPER1.3
BY2  (via drill 0.6)
  Top 0.254: LED14.C 42.55,39.49 42.55,36.58 42.94,36.2 v44.46,36.2
  Bottom 0.254: v44.46,36.2 44.46,29.72 44.97,29.21 44.97,9.27 UPPER2.3
BY3  (via drill 0.6)
  Top 0.254: LED20.C 55.25,39.49 55.25,36.58 55.64,36.2 v57.16,36.2
  Bottom 0.254: v57.16,36.2 57.16,29.72 57.67,29.21 57.67,9.27 UPPER3.3
BY4  (via drill 0.6)
  Top 0.254: LED26.C 67.95,39.49 67.95,36.58 68.34,36.2 v69.86,36.2
  Bottom 0.254: v69.86,36.2 69.86,29.72 70.37,29.21 70.37,9.27 UPPER4.3
BY5  (via drill 0.6)
  Top 0.254: LED32.C 80.65,39.49 80.65,36.58 81.04,36.2 v82.56,36.2
  Bottom 0.254: v82.56,36.2 82.56,29.72 83.07,29.21 83.07,9.27 UPPER5.3
BY6  (via drill 0.6)
  Top 0.254: LED38.C 20.96,60.09 20.96,63 20.58,63.38 v19.06,63.38
  Bottom 0.254: v19.06,63.38 19.06,69.85 18.55,70.36 18.55,90.3 UPPER6.3
BY7  (via drill 0.6)
  Top 0.254: LED44.C 33.66,60.09 33.66,63 33.28,63.38 v31.76,63.38
  Bottom 0.254: v31.76,63.38 31.76,69.85 31.25,70.36 31.25,90.3 UPPER7.3
BY8  (via drill 0.6)
  Top 0.254: LED50.C 46.36,60.09 46.36,63 45.98,63.38 v44.46,63.38
  Bottom 0.254: v44.46,63.38 44.46,69.85 43.95,70.36 43.95,90.3 UPPER8.3
BY9  (via drill 0.6)
  Top 0.254: LED56.C 59.06,60.09 59.06,63 58.68,63.38 v57.16,63.38
  Bottom 0.254: v57.16,63.38 57.16,69.85 56.65,70.36 56.65,90.3 UPPER9.3
BY10  (via drill 0.6)
  Top 0.254: LED62.C 71.76,60.09 71.76,63 71.38,63.38 v69.86,63.38
  Bottom 0.254: v69.86,63.38 69.86,69.85 69.35,70.36 69.35,90.3 UPPER10.3
BY11  (via drill 0.6)
  Top 0.254: LED68.C 84.46,60.09 84.46,63 84.08,63.38 v82.56,63.38
  Bottom 0.254: v82.56,63.38 82.56,69.85 82.05,70.36 82.05,90.3 UPPER11.3
(copper drawn outside any net)
  shapes: Top area x1

## Text on the board
Top: GYR+ | GYR+ | GYR+ | GYR+ | GYR+ | GYR+ | GYR+ | GYR+ | GYR+ | GYR+ | GYR+ | GYR+
Milling: V-SCORE | V-SCORE | V-SCORE | V-SCORE | V-SCORE | V-SCORE | V-SCORE | V-SCORE | V-SCORE
tDocu: 1.0E | 1.1 | Dual CL Signal Mast | Black soldermask / white silkscreen | John Plocher - SPCoast.com
bDocu: Made in the PCR, Coast Division, NMRA | Model Railroading is Fun!